# EAGLE board StrBrkV3 (EAGLE 7.5.0)
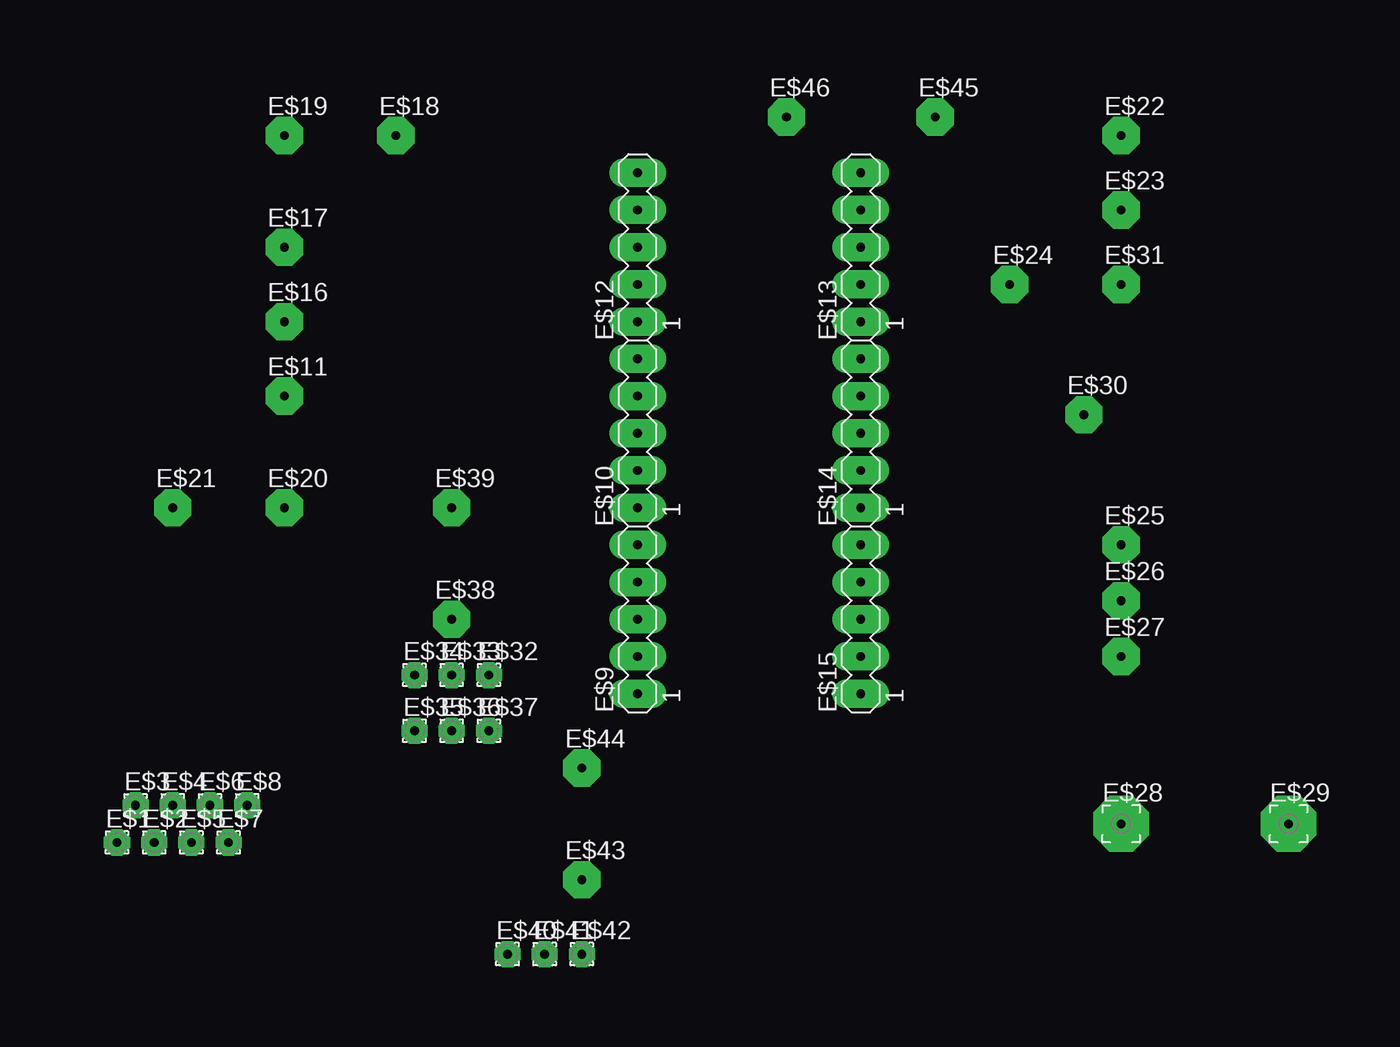
[diagram p0: board, top side]
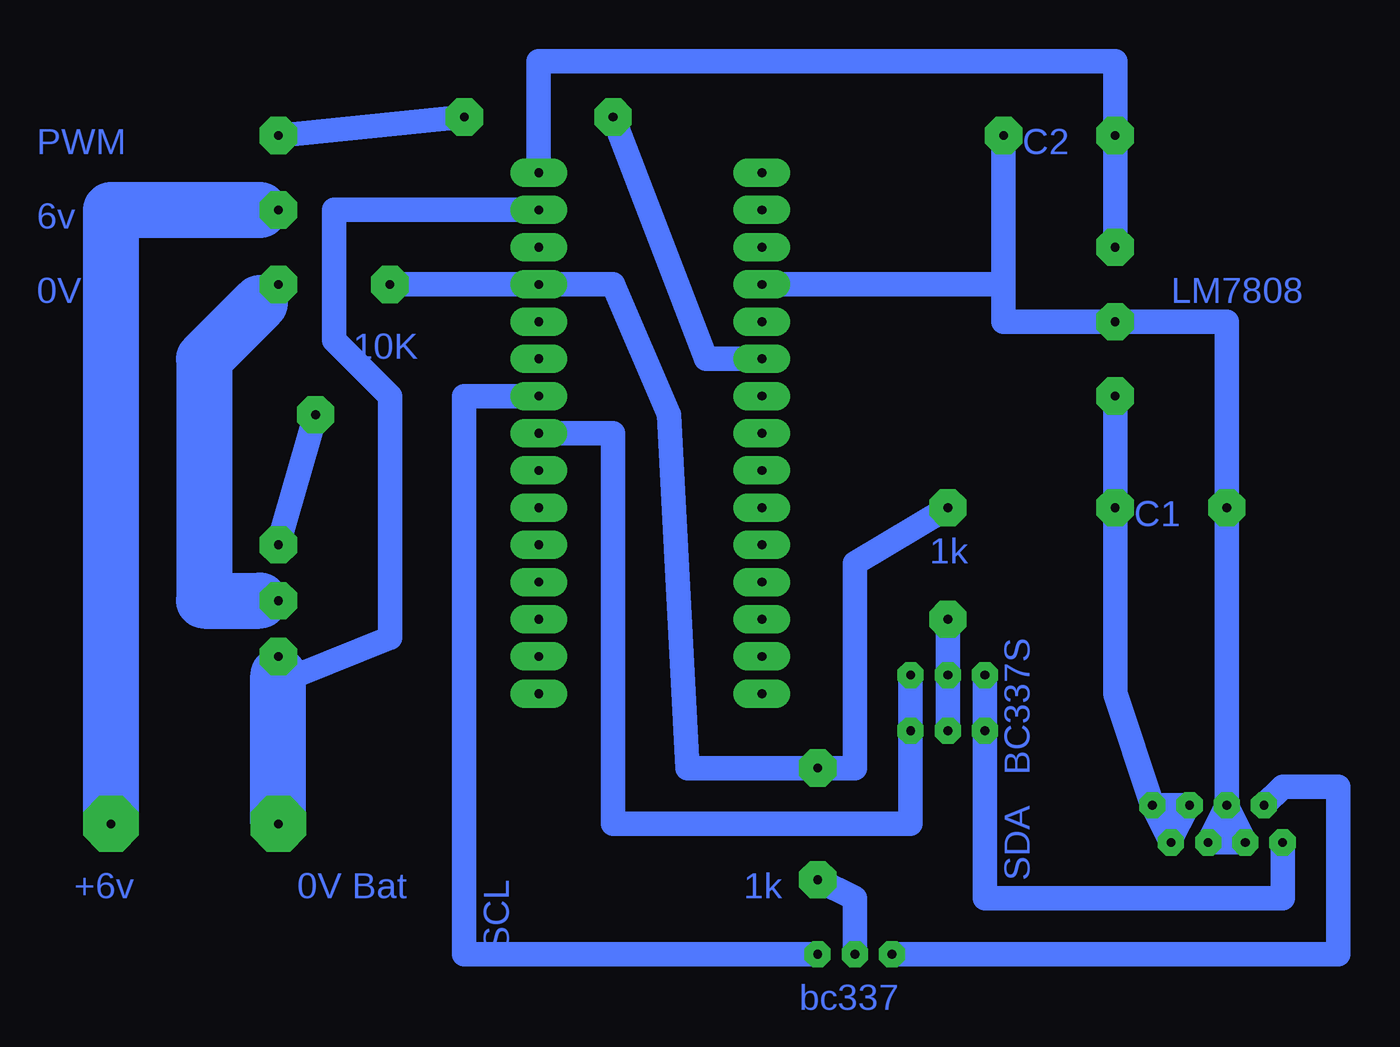
[diagram p1: board, bottom side, seen from below]

No outline drawn. Coordinates in mm, seen from the top.
Copper layers (1*16): Top 0.035mm / dielectric 1.5mm / Bottom 0.035mm
Design rules "default": minimum track width 10mil, minimum drill 24mil, track to track 8mil, track to pad 8mil, pad to pad 8mil, via to via 8mil, smd to smd 8mil, copper to edge 40mil, drill to drill 8mil, minimum pad ring 10mil, minimum via ring 8mil, stop-mask expansion 4mil, vias tented up to drill 0mil, thermal gap 10mil

## Footprints (pad centres in the part's own frame; a part is rotated, then mirrored left to right if it is on the bottom)
1,6/0,8 = drill 0.6 pad 1.778 octagon: 1 0,0
MA05-1 = drill 0.6 pad 1.93 long: 1 -5.08,0; 2 -2.54,0; 3 0,0; 4 2.54,0; 5 5.08,0
2,15/1,0 = drill 0.6 pad 2.54 octagon: 1 0,0
2,54/0,8 = drill 0.6 pad 3.81 octagon: 1 0,0

## Placement (x,y rotation side)
E$1  [1,6/0,8]  13.97,10.16 0 top
E$2  [1,6/0,8]  16.51,10.16 0 top
E$3  [1,6/0,8]  15.24,12.7 0 top
E$4  [1,6/0,8]  17.78,12.7 0 top
E$5  [1,6/0,8]  19.05,10.16 0 top
E$6  [1,6/0,8]  20.32,12.7 0 top
E$7  [1,6/0,8]  21.59,10.16 0 top
E$8  [1,6/0,8]  22.86,12.7 0 top
E$9  [MA05-1]  49.53,25.4 90 top
E$10  [MA05-1]  49.53,38.1 90 top
E$11  [2,15/1,0]  25.4,40.64 0 top
E$12  [MA05-1]  49.53,50.8 90 top
E$13  [MA05-1]  64.77,50.8 90 top
E$14  [MA05-1]  64.77,38.1 90 top
E$15  [MA05-1]  64.77,25.4 90 top
E$16  [2,15/1,0]  25.4,45.72 0 top
E$17  [2,15/1,0]  25.4,50.8 0 top
E$18  [2,15/1,0]  33.02,58.42 0 top
E$19  [2,15/1,0]  25.4,58.42 0 top
E$20  [2,15/1,0]  25.4,33.02 0 top
E$21  [2,15/1,0]  17.78,33.02 0 top
E$22  [2,15/1,0]  82.55,58.42 0 top
E$23  [2,15/1,0]  82.55,53.34 0 top
E$24  [2,15/1,0]  74.93,48.26 0 top
E$25  [2,15/1,0]  82.55,30.48 0 top
E$26  [2,15/1,0]  82.55,26.67 0 top
E$27  [2,15/1,0]  82.55,22.86 0 top
E$28  [2,54/0,8]  82.55,11.43 0 top
E$29  [2,54/0,8]  93.98,11.43 0 top
E$30  [2,15/1,0]  80.01,39.37 0 top
E$31  [2,15/1,0]  82.55,48.26 0 top
E$32  [1,6/0,8]  39.37,21.59 0 top
E$33  [1,6/0,8]  36.83,21.59 0 top
E$34  [1,6/0,8]  34.29,21.59 0 top
E$35  [1,6/0,8]  34.29,17.78 0 top
E$36  [1,6/0,8]  36.83,17.78 0 top
E$37  [1,6/0,8]  39.37,17.78 0 top
E$38  [2,15/1,0]  36.83,25.4 0 top
E$39  [2,15/1,0]  36.83,33.02 0 top
E$40  [1,6/0,8]  40.64,2.54 0 top
E$41  [1,6/0,8]  43.18,2.54 0 top
E$42  [1,6/0,8]  45.72,2.54 0 top
E$43  [2,15/1,0]  45.72,7.62 0 top
E$44  [2,15/1,0]  45.72,15.24 0 top
E$45  [2,15/1,0]  69.85,59.69 0 top
E$46  [2,15/1,0]  59.69,59.69 0 top

## Library data of the parts
E$1-E$46 = cls

## Nets
S$1: E$13.5 E$17.1
S$2: E$8.1 E$11.1
S$3: E$25.1
S$4: E$28.1
S$5: E$24.1 E$39.1
S$6: E$1.1 E$34.1 E$35.1
S$8: E$2.1 E$4.1 E$5.1 E$12.2 E$16.1
S$9: E$14.4
S$10: E$14.3 E$32.1 E$37.1
S$11: E$33.1 E$36.1 E$38.1
S$12: E$3.1
S$13: E$41.1
S$15: E$10.5 E$46.1
S$16: E$22.1
S$18: E$13.4

## Tracks (layer width: path | path; a pad name or v marks a point on that pad's centre or on a via)
S$1
  Bottom 1.676: E$17.1 25.4,63.5 64.77,63.5 E$13.5
S$2
  Bottom 1.422: 20.32,12.7 21.59,10.16
  Bottom 1.676: 20.32,12.7 E$8.1 | E$8.1 21.59,10.16 | E$8.1 25.4,20.32 E$11.1
S$3
  Bottom 1.676: E$25.1 80.01,39.37
S$4
  Bottom 3.81: E$28.1 82.55,21.59
S$5
  Bottom 1.676: E$24.1 59.69,48.26 55.88,39.37 54.61,15.24 43.18,15.24 43.18,29.21 E$39.1
S$6
  Bottom 1.676: E$1.1 13.97,6.35 34.29,6.35 E$35.1 E$34.1
S$7
  Bottom 3.81: 93.98,11.43 93.98,53.34 83.82,53.34
S$8
  Bottom 1.676: E$4.1 E$2.1 E$5.1 E$4.1 | E$4.1 17.78,45.72 E$16.1 33.02,45.72 33.02,48.26 | 33.02,48.26 33.02,58.42 | E$12.2 33.02,48.26
S$9
  Bottom 1.676: 45.72,2.54 69.85,2.54 69.85,40.64 E$14.4
S$10
  Bottom 1.676: E$32.1 E$37.1 39.37,11.43 59.69,11.43 59.69,38.1 E$14.3
S$11
  Bottom 1.676: E$38.1 E$33.1 E$36.1
S$12
  Bottom 1.676: E$3.1 13.97,13.97 10.16,13.97 10.16,2.54 40.64,2.54
S$13
  Bottom 1.676: E$41.1 43.18,6.35 45.72,7.62
S$15
  Bottom 1.676: E$10.5 53.34,43.18 E$46.1
S$16
  Bottom 1.676: E$22.1 69.85,59.69
S$17
  Bottom 3.81: 83.82,26.67 87.63,26.67 87.63,43.18 83.82,46.99
S$18
  Bottom 1.676: 81.28,21.59 74.93,24.13 74.93,40.64 78.74,44.45 78.74,53.34 E$13.4

## Text on the board
Bottom: C2 | PWM | 6v | LM7808 | 0V | 10K | C1 | 1k | BC337S | SDA | SCL | 1k | 0V Bat | +6v | bc337